# Altium PCB MotorControl.PcbDoc
Units mil, origin at the board's own origin, x right, y up, seen from the top; angles counter-clockwise.
Board outline 1460 x 2290 mil, 2 copper layers (Top Layer, Bottom Layer); 14 components, 0 nets, 86 pads, 11 vias.
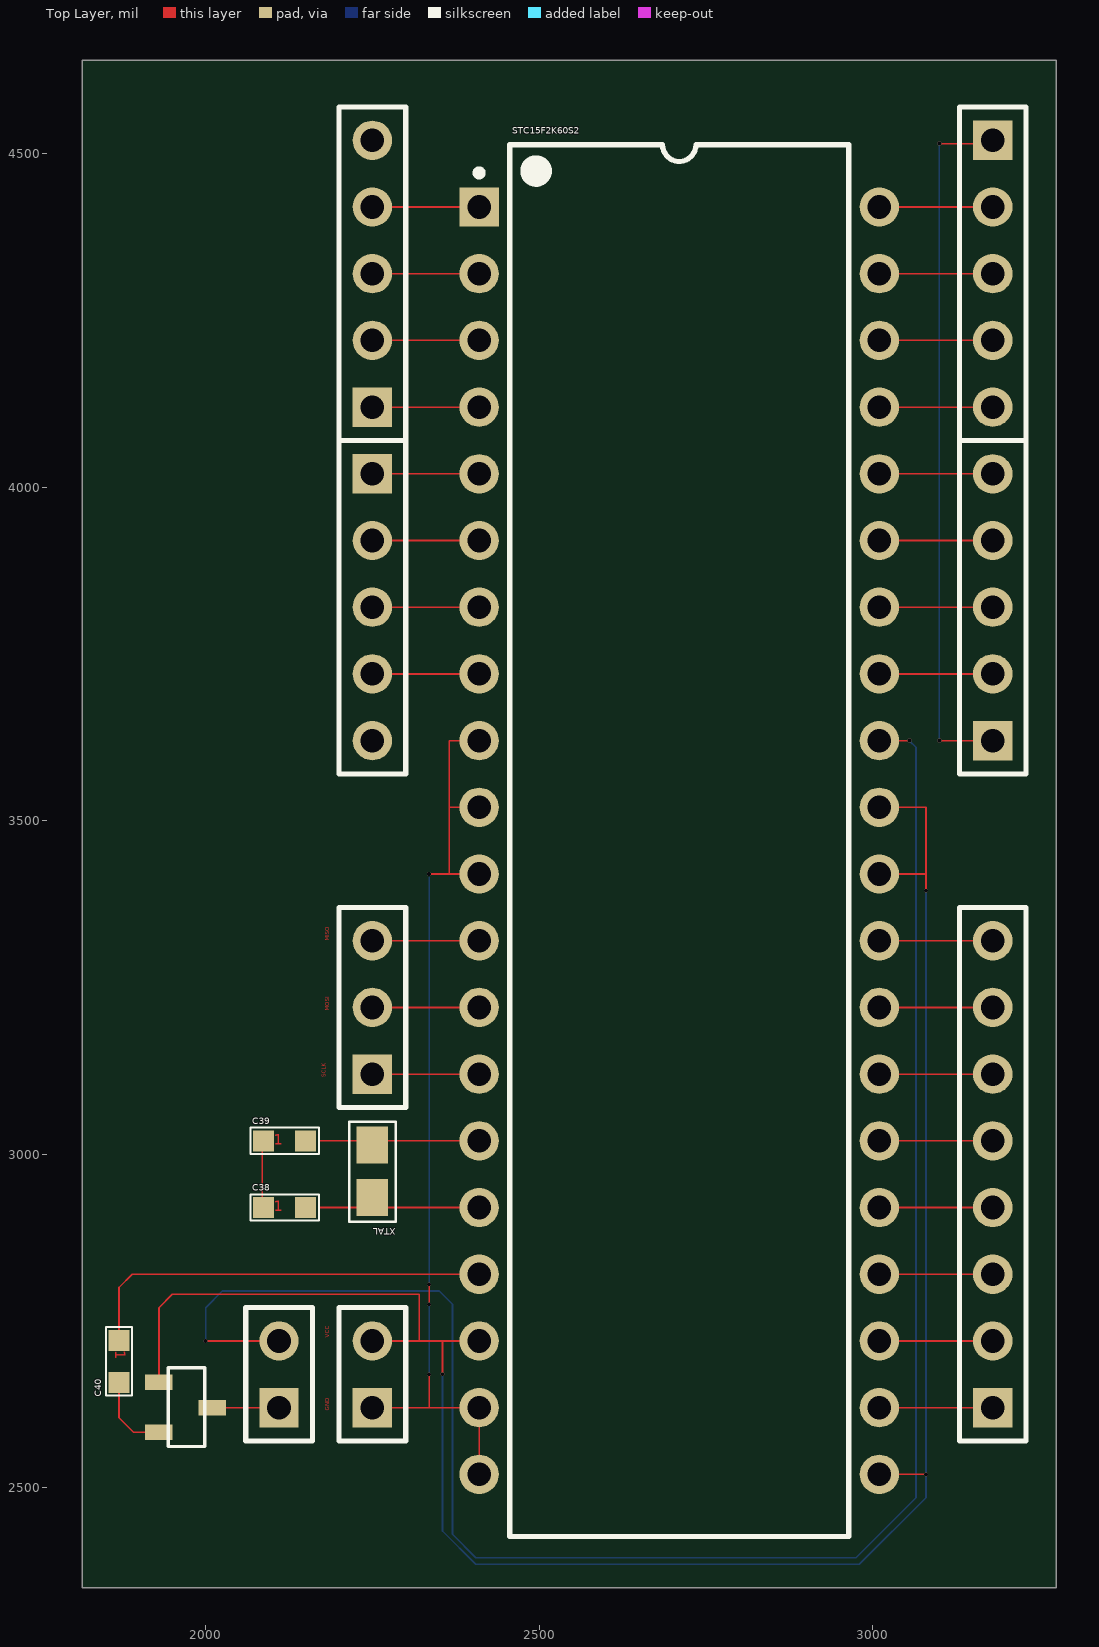
[diagram p0: Top Layer view]
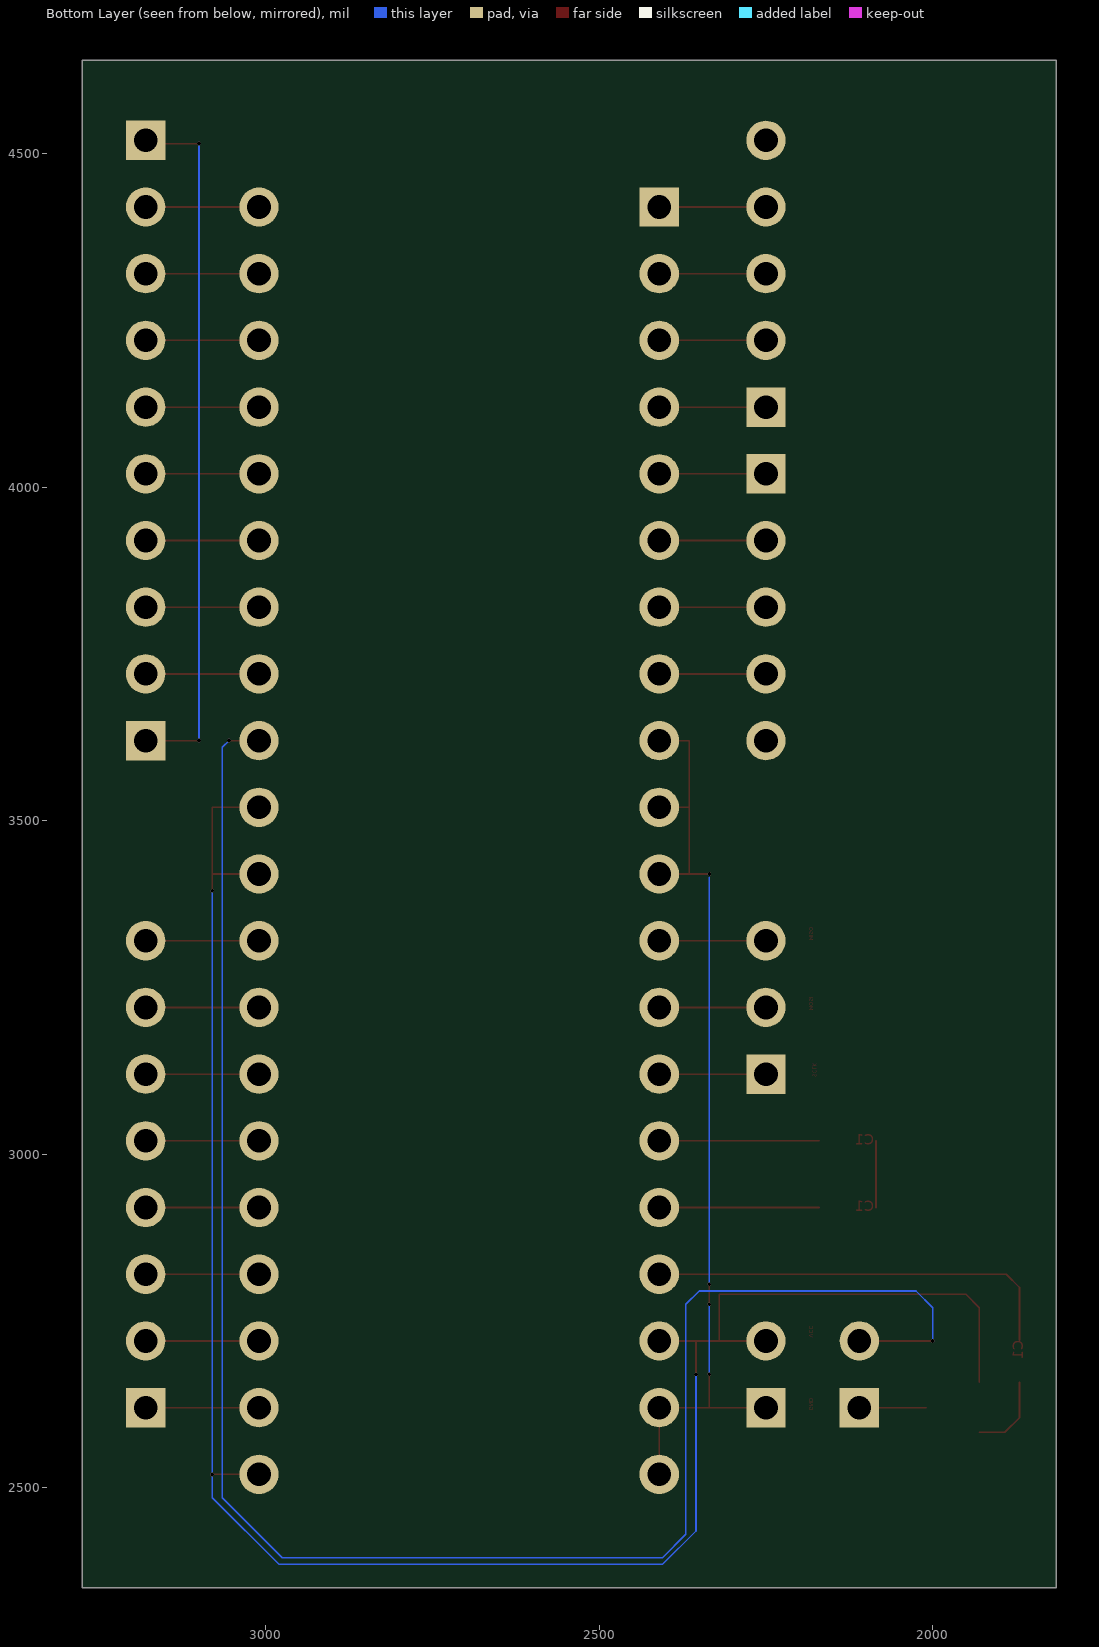
[diagram p1: Bottom Layer view, seen from below]

## Layer stack, top to bottom
Top Solder: solder mask 0.4, Solder Resist, Dk 3.5
Top Layer: signal copper 1.4
Dielectric 1: dielectric 12.6, FR-4, Dk 4.8
Bottom Layer: signal copper 1.4
Bottom Solder: solder mask 0.4, Solder Resist, Dk 3.5

## Board outline
1815,2350 3275,2350 3275,4640 1815,4640

## Design rules (kind name [scope] priority, off if disabled: settings)
Clearance [All] p1: gap=10 ignorepadtopadclearanceinfootprint=FALSE except(0: Arc-Hole Track-Hole SMDPad-Hole THPad-Hole Via-Hole Fill-Hole Poly-Hole Region-Hole Text-Hole)
PolygonConnect [All] p1: connectstyle=Relief reliefconductorwidth=10 reliefentries=4 polygonreliefangle="90 Angle" airgapwidth=10
RoutingVias [All] p1: holewidth=28 width=50 viastyle="Through Hole" minholewidth=28 minwidth=50 maxholewidth=28 maxwidth=50
SolderMaskExpansion [All] p1: expansion=4
Width [All] p1: maxlimit=10 minlimit=10 preferedwidth=10
30 further rules are at their usual default settings.

## Components (designator, comment, footprint, x,y, rotation, side; value= is the part's Value field where it differs from the comment)
C38 "Comment" CAP_0603_FIRE 2087.01,2920 r0 top
C39 "Comment" CAP_0603_FIRE 2087.01,3020 r0 top
C40 "Comment" CAP_0603_FIRE 1870,2720.99 r270 top
STC15F2K60S2 "Comment" DIP40 2710,3470 r0 top
XTAL "Comment" 3215 2250,3013.74 r270 top
? "Comment" HDR1X8 3180,2620 r90 top
? "Comment" HDR1X5 3180,3620 r90 top
? "Comment" HDR1X5 3180,4520 r270 top
? "Comment" HDR1X5 2250,4120 r90 top
? "Comment" HDR1X5 2250,4020 r270 top
? "Comment" HDR1X3 2250,3120 r90 top
? "Comment" HDR1X2 2250,2620 r90 top
? "Comment" HDR1X2 2110,2620 r90 top
? "Comment" SOT-23 1930,2658 r270 top

## Footprints (in the part's own frame and the unit in brackets; to place one, negate y for a bottom-side part, rotate by r counter-clockwise, add the part's x,y. Pads: shape width x height; smd on the part's side, far side on the other; paste and mask are expansions set on the pad)
3215 [mm]
  rect 1.4x1.2 smd: 1(0,0) 2(2,0)
  silkscreen extent -0.89,-0.89 2.92,0.89
CAP_0603_FIRE [mm]
  rect 0.8x0.8 smd: 1(0,0) 2(1.6,0)
  silkscreen extent -0.5,-0.5 2.1,0.5
DIP40 [mm] "DIP, 40-Leads, Row Spacing 15.24mm, Pitch 2.54mm, Body 52.39x13.72mm"
  rect 1.5x1.5 hole 0.9: 1(-7.62,24.13)
  round 1.5 hole 0.9: 2(-7.62,21.59) 3(-7.62,19.05) 4(-7.62,16.51) 5(-7.62,13.97) 6(-7.62,11.43) 7(-7.62,8.89) 8(-7.62,6.35) 9(-7.62,3.81) 10(-7.62,1.27) 11(-7.62,-1.27) 12(-7.62,-3.81) 13(-7.62,-6.35) 14(-7.62,-8.89) 15(-7.62,-11.43) 16(-7.62,-13.97) 17(-7.62,-16.51) 18(-7.62,-19.05) 19(-7.62,-21.59) 20(-7.62,-24.13) 21(7.62,-24.13) 22(7.62,-21.59) 23(7.62,-19.05) 24(7.62,-16.51) 25(7.62,-13.97) 26(7.62,-11.43) 27(7.62,-8.89) 28(7.62,-6.35) 29(7.62,-3.81) 30(7.62,-1.27) 31(7.62,1.27) 32(7.62,3.81) 33(7.62,6.35) 34(7.62,8.89) 35(7.62,11.43) 36(7.62,13.97) 37(7.62,16.51) 38(7.62,19.05) 39(7.62,21.59) 40(7.62,24.13)
  silkscreen extent -7.74,-26.5 6.45,26.5, body extent -7.05,-26.47 7.05,26.47, height 4.92
HDR1X2 [mm] "Connector; Header; 2 Position"
  rect 1.5x1.5 hole 0.9: 1(0,0)
  round 1.5 hole 0.9: 2(2.54,0)
  silkscreen extent -1.27,-1.27 3.81,1.27
HDR1X3 [mm] "Connector; Header; 3 Position"
  rect 1.5x1.5 hole 0.9: 1(0,0)
  round 1.5 hole 0.9: 2(2.54,0) 3(5.08,0)
  silkscreen extent -1.27,-1.27 6.35,1.27
HDR1X5 [mm] "Connector; Header; 5 Position"
  rect 1.5x1.5 hole 0.9: 1(0,0)
  round 1.5 hole 0.9: 2(2.54,0) 3(5.08,0) 4(7.62,0) 5(10.16,0)
  silkscreen extent -1.27,-1.27 11.43,1.27
HDR1X8 [mm] "Connector; Header; 8 Position"
  rect 1.5x1.5 hole 0.9: 1(0,0)
  round 1.5 hole 0.9: 2(2.54,0) 3(5.08,0) 4(7.62,0) 5(10.16,0) 6(12.7,0) 7(15.24,0) 8(17.78,0)
  silkscreen extent -1.27,-1.27 19.05,1.27
SOT-23 [mm]
  rect 0.6x1.05 smd: 1(0,0) 2(1.9,0) 3(0.965,2.032)
  silkscreen extent -0.55,0.35 2.45,1.75

## Via types
v1: diameter 5.75, hole 5.75, Top Layer to Bottom Layer, 11 vias

## Nets (pads, with @x,y where several pads share a name; then routed paths per layer and width w, separated by ;. In a path a pad name is that pad's centre, name@x,y a point inside that pad or via, vN(x,y) a via of type N, cw(c..) or ccw(c..) an arc to the next point about the centre after c; other vN are vias at no path point)
pads on no net: ?.1 ?.2 ?.3 ?.4 ?.5 ?.6 ?.7 ?.8 C38.1 C38.2 C39.1 C39.2 C40.1 C40.2 STC15F2K60S2.1 STC15F2K60S2.2 STC15F2K60S2.3 STC15F2K60S2.4 STC15F2K60S2.5 STC15F2K60S2.6 STC15F2K60S2.7 STC15F2K60S2.8 STC15F2K60S2.9 STC15F2K60S2.10 STC15F2K60S2.11 STC15F2K60S2.12 STC15F2K60S2.13 STC15F2K60S2.14 STC15F2K60S2.15 STC15F2K60S2.16 STC15F2K60S2.17 STC15F2K60S2.18 STC15F2K60S2.19 STC15F2K60S2.20 STC15F2K60S2.21 STC15F2K60S2.22 STC15F2K60S2.23 STC15F2K60S2.24 STC15F2K60S2.25 STC15F2K60S2.26 STC15F2K60S2.27 STC15F2K60S2.28 STC15F2K60S2.29 STC15F2K60S2.30 STC15F2K60S2.31 STC15F2K60S2.32 STC15F2K60S2.33 STC15F2K60S2.34 STC15F2K60S2.35 STC15F2K60S2.36 STC15F2K60S2.37 STC15F2K60S2.38 STC15F2K60S2.39 STC15F2K60S2.40 XTAL.1 XTAL.2
copper on no net: | length 14281.3
  Top Layer w2.51: 1870,2658 1870,2605 1891.8,2583.2 1930,2583.2 ; 1870,2720.99 1870,2800 1890,2820 2305,2820 2410,2820 ; 1930,2658 1930,2770 1950,2790 2320,2790 2320,2720 ; v1(2000,2720) 2110,2720 ; 2010,2620 2110,2620 ; 2085,2920 2085,3020 ; 2170,2920 2410,2920 ; 2170,3020 2410,3020 ; 2245,4120 2410,4120 ; 2245,4220 2410,4220 ; 2245,4320 2410,4320 ; 2245,4420 2410,4420 ; 2250,2620 2410,2620 2410,2520 ; 2250,2720 2410,2720 ; 2250,3120 2410,3120 ; 2250,3220 2410,3220 ; 2250,3320 2410,3320 ; 2250,3720 2410,3720 ; 2250,3820 2410,3820 ; 2250,3920 2410,3920 ; 2250,4020 2410,4020 ; 2335,2620 v1(2335,2670) ; v1(2335,2775) v1(2335,2805) ; v1(2335,3420) 2365,3420 ; v1(2355,2670) 2355,2720 ; 2365,3520 2370,3520 2410,3520 ; 2410,3420 2365,3420 ; 2410,3620 2365,3620 2365,3420 ; 3010,2520 v1(3080,2520) ; 3010,2620 3180,2620 ; 3010,2720 3180,2720 ; 3010,2820 3180,2820 ; 3010,2920 3180,2920 ; 3010,3020 3180,3020 ; 3010,3120 3180,3120 ; 3010,3220 3180,3220 ; 3010,3320 3180,3320 ; 3010,3420 3080,3420 ; 3010,3520 3080,3520 v1(3080,3395) ; 3010,3620 v1(3055,3620) ; 3010,3720 3180,3720 ; 3010,3820 3180,3820 ; 3010,3920 3180,3920 ; 3010,4020 3180,4020 ; 3010,4120 3180,4120 ; 3010,4220 3180,4220 ; 3010,4320 3180,4320 ; 3010,4420 3180,4420 ; v1(3100,3620) 3180,3620 ; v1(3100,4515) 3175,4515
  Bottom Layer w2.51: v1(2000,2720) 2000,2770 2025,2795 2350,2795 2370,2775 2370,2430 2405,2395 2975,2395 3065,2485 3065,3485 3065,3610 v1(3055,3620) ; v1(2335,2670) v1(2335,2775) ; v1(2335,2805) 2335,3415 ; v1(2355,2670) 2355,2435 2405,2385 2980,2385 3080,2485 3080,3295 v1(3080,3395) ; v1(3100,3620) 3100,3800 v1(3100,4515)

## Other copper
Top Layer:
  text "MISO" at 2185,3320 h6 r90
  text "MOSI" at 2185,3215 h6 r90
  text "SCLK" at 2180,3115 h6 r90
  text "VCC" at 2185,2725 h6 r90
  text "GND" at 2185,2615 h6 r90

## Text inside footprints (layer, text, board x,y; h text height)
C38: Top Layer "C1" at 2087.3,2914.37 h15.75
C39: Top Layer "C1" at 2087.3,3014.37 h15.75
C40: Top Layer "C1" at 1864.37,2720.7 h15.75 r270